# EAGLE board breadboard (EAGLE 9.7.0)

Size 59.69 x 53.34 mm. Coordinates in mm from the lower left corner, seen from the top.
Outline: 1.27,53.34 54.61,53.34 arc-90 59.69,48.26 59.69,1.27 58.42,0 1.27,0 0,1.27 0,52.07 1.27,53.34
Copper layers (1*16): Top 0.035mm / dielectric 1.5mm / Bottom 0.035mm
Design rules "default": minimum track width 6mil, minimum drill 0.35mm, track to track 6mil, track to pad 6mil, pad to pad 6mil, via to via 6mil, smd to smd 6mil, copper to edge 40mil, drill to drill 6mil, minimum pad ring 10mil, minimum via ring 8mil, stop-mask expansion 4mil, vias tented up to drill 0mil, thermal gap 10mil
Holes 2.54 mm at 3.81,49.53 3.81,3.81 55.88,49.53 55.88,3.81

## Footprints (pad centres in the part's own frame; a part is rotated, then mirrored left to right if it is on the bottom)
ARDUINO-NANO-JUMPER-1 = drill 1.016 long: D2 7.62,0; D3 5.08,0; D4 2.54,0; D5 0,0; D6 -2.54,0; D7 -5.08,0; D8 -7.62,0; D9 -10.16,0; D10 -12.7,0; D11 -15.24,0; D12 -17.78,0; GND 10.16,0; RST 12.7,0; RX0 15.24,0; TX1 17.78,0
ARDUINO-NANO-JUMPER-2 = drill 1.016 long: 3V3 -15.24,0; 5V 10.16,0; A0 -10.16,0; A1 -7.62,0; A2 -5.08,0; A3 -2.54,0; A4 0,0; A5 2.54,0; A6 5.08,0; A7 7.62,0; D13 -17.78,0; GND 15.24,0; REF -12.7,0; RST 12.7,0; VIN 17.78,0

## Placement (x,y rotation side)
U$2  ARDUINO-NANO-JUMPER-1  [ARDUINO-NANO-JUMPER-1]  30.48,3.81 0 bottom
U$5  ARDUINO-NANO-JUMPER-2  [ARDUINO-NANO-JUMPER-2]  30.48,49.53 0 bottom

## Library data of the parts
U$2 U$5 = RC Car

## Text on the board
tPlace: VIN | GND | RST | 5V | A7 | A6 | A5 | A4 | A3 | A2 | A1 | A0 | REF | 3V3 | D13 | GND | D2 | D3 | D4 | D5 | D6 | D7 | D8 | D9 | D10 | D11 | D12 | TX1 | RX0 | RST
bPlace: RC CARS / BREADBOARD V0.1